# Altium PCB GMU.PcbDoc (part 1 of 2)
Units mil, origin at the board's own origin, x right, y up, seen from the top; angles counter-clockwise.
Board outline 2287.2 x 1425 mil, 4 copper layers (Top Layer, GND, 3V3, Bottom Layer), stack 38.189 mil thick; 106 components, 59 nets, 301 pads, 340 vias.
Unrouted connection lines stored in the file: 21.
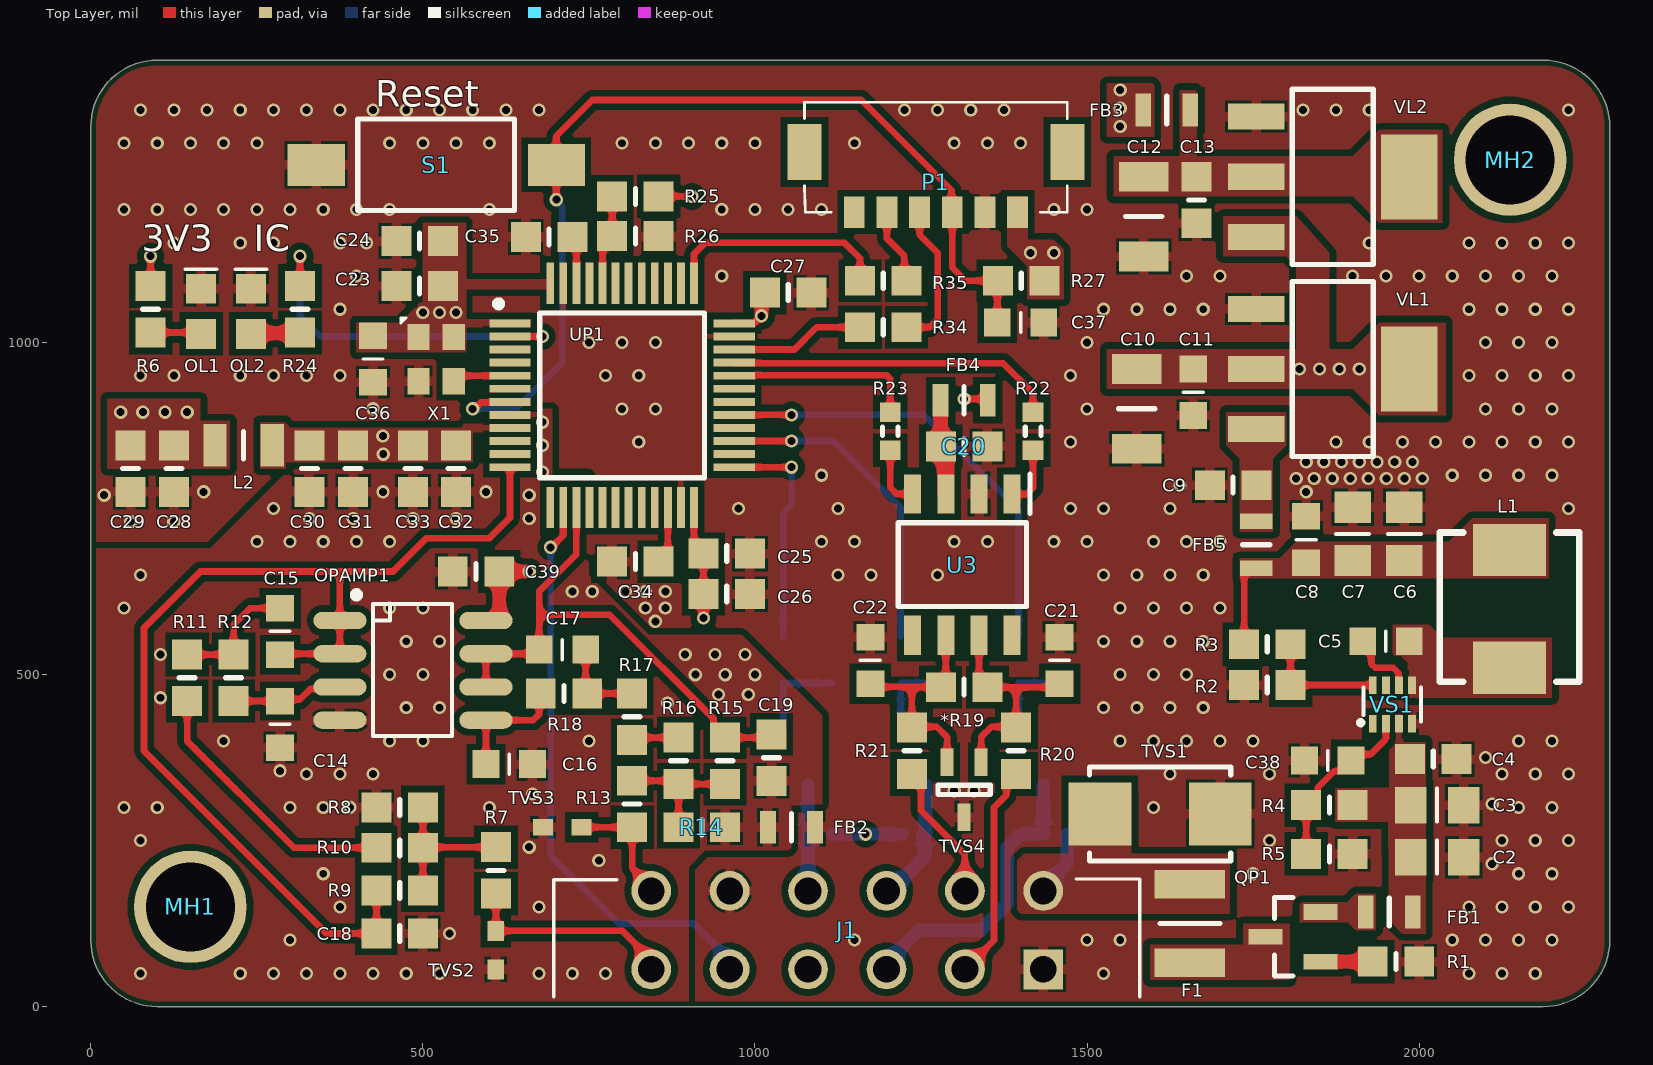
[diagram p0: Top Layer view]
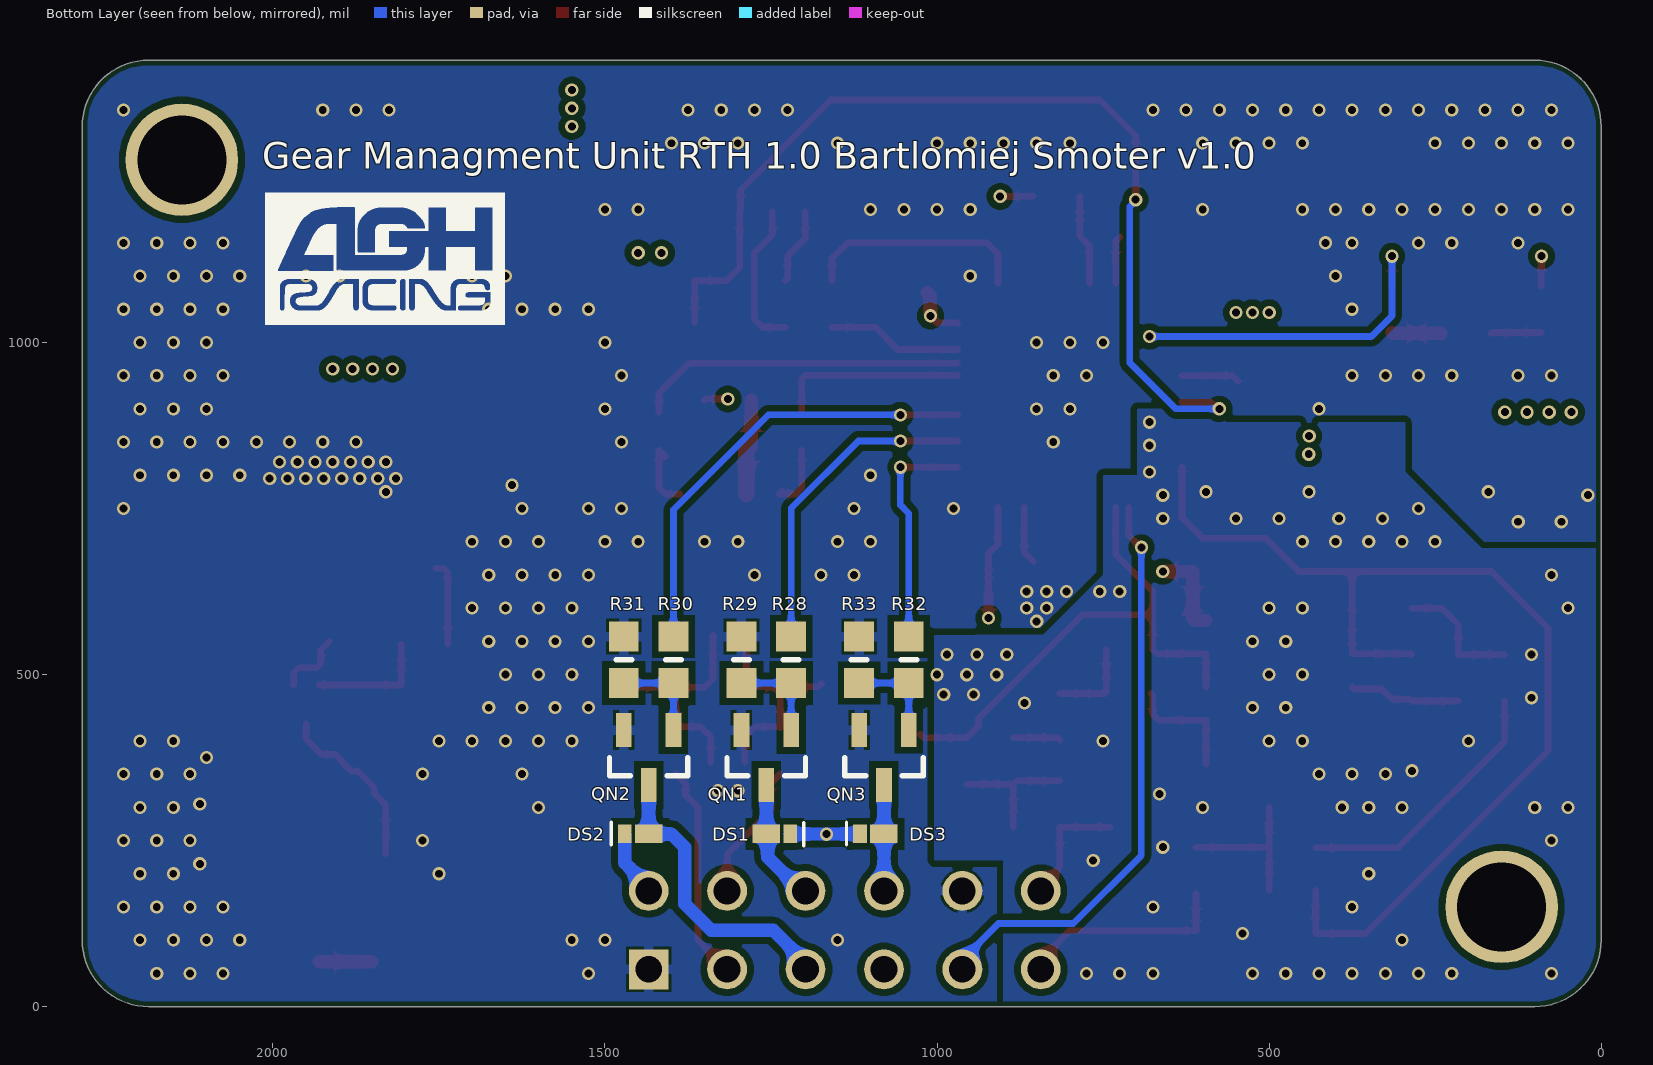
[diagram p1: Bottom Layer view, seen from below]
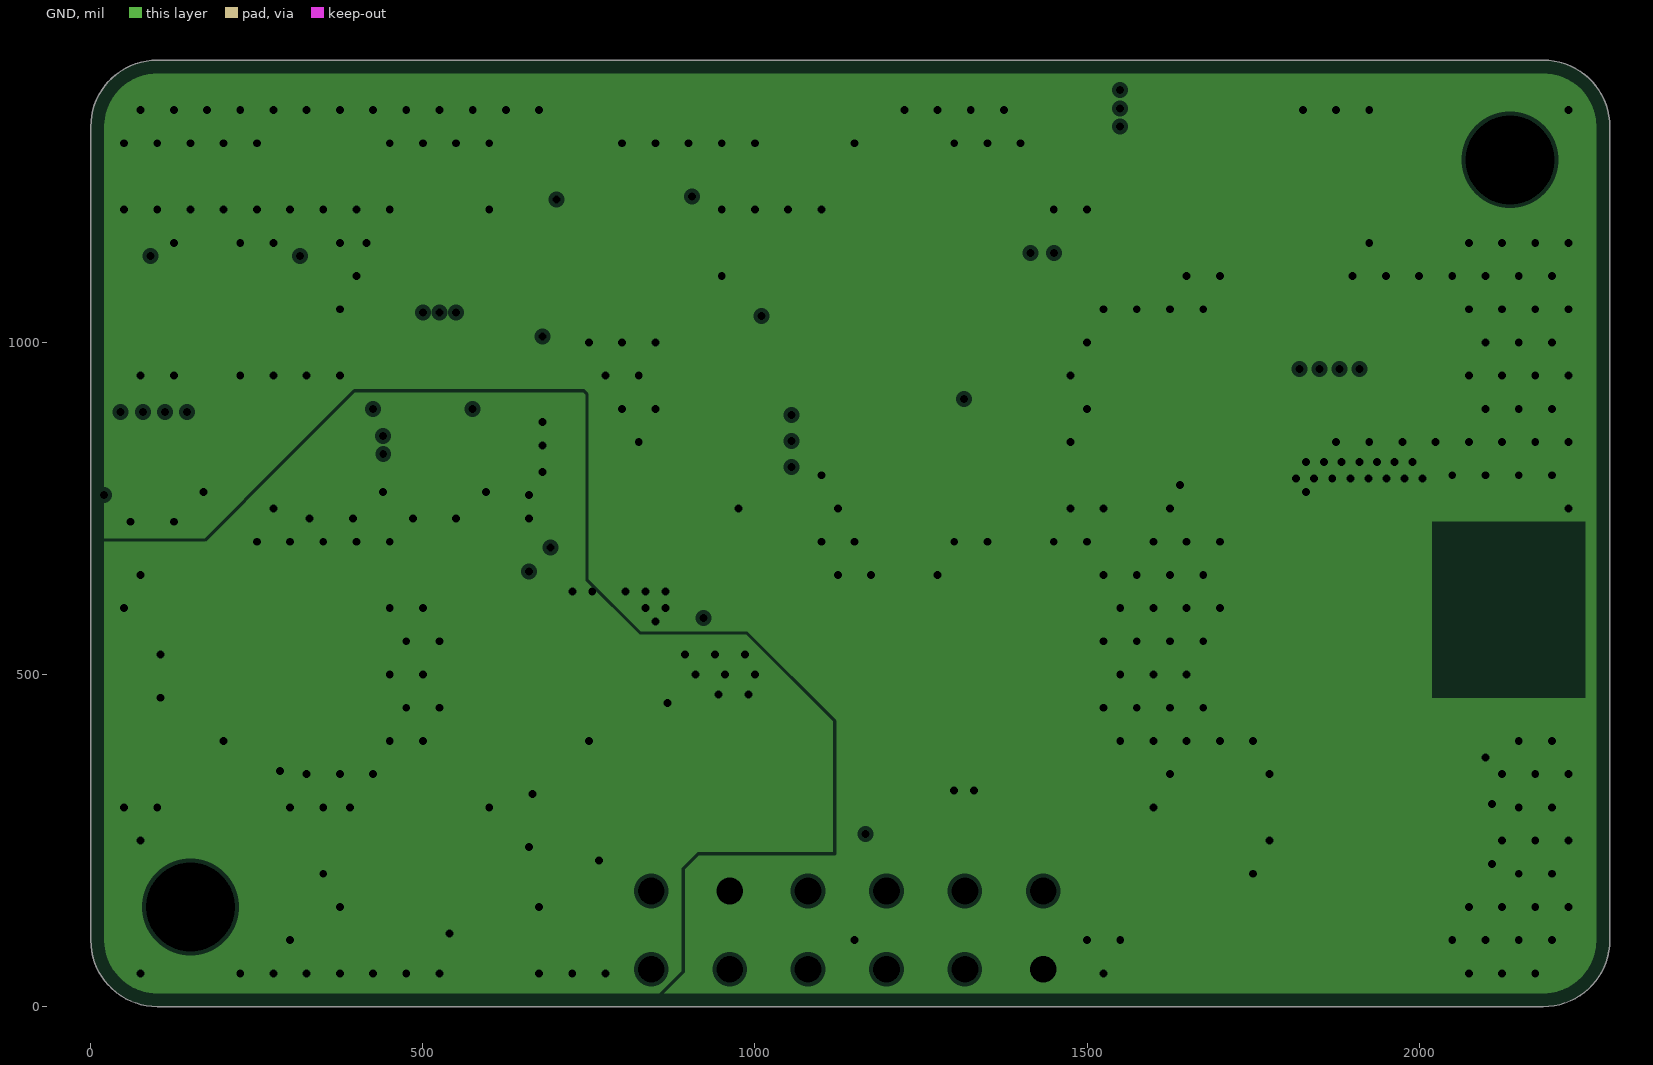
[diagram p2: GND, clearances drawn from the general rule]
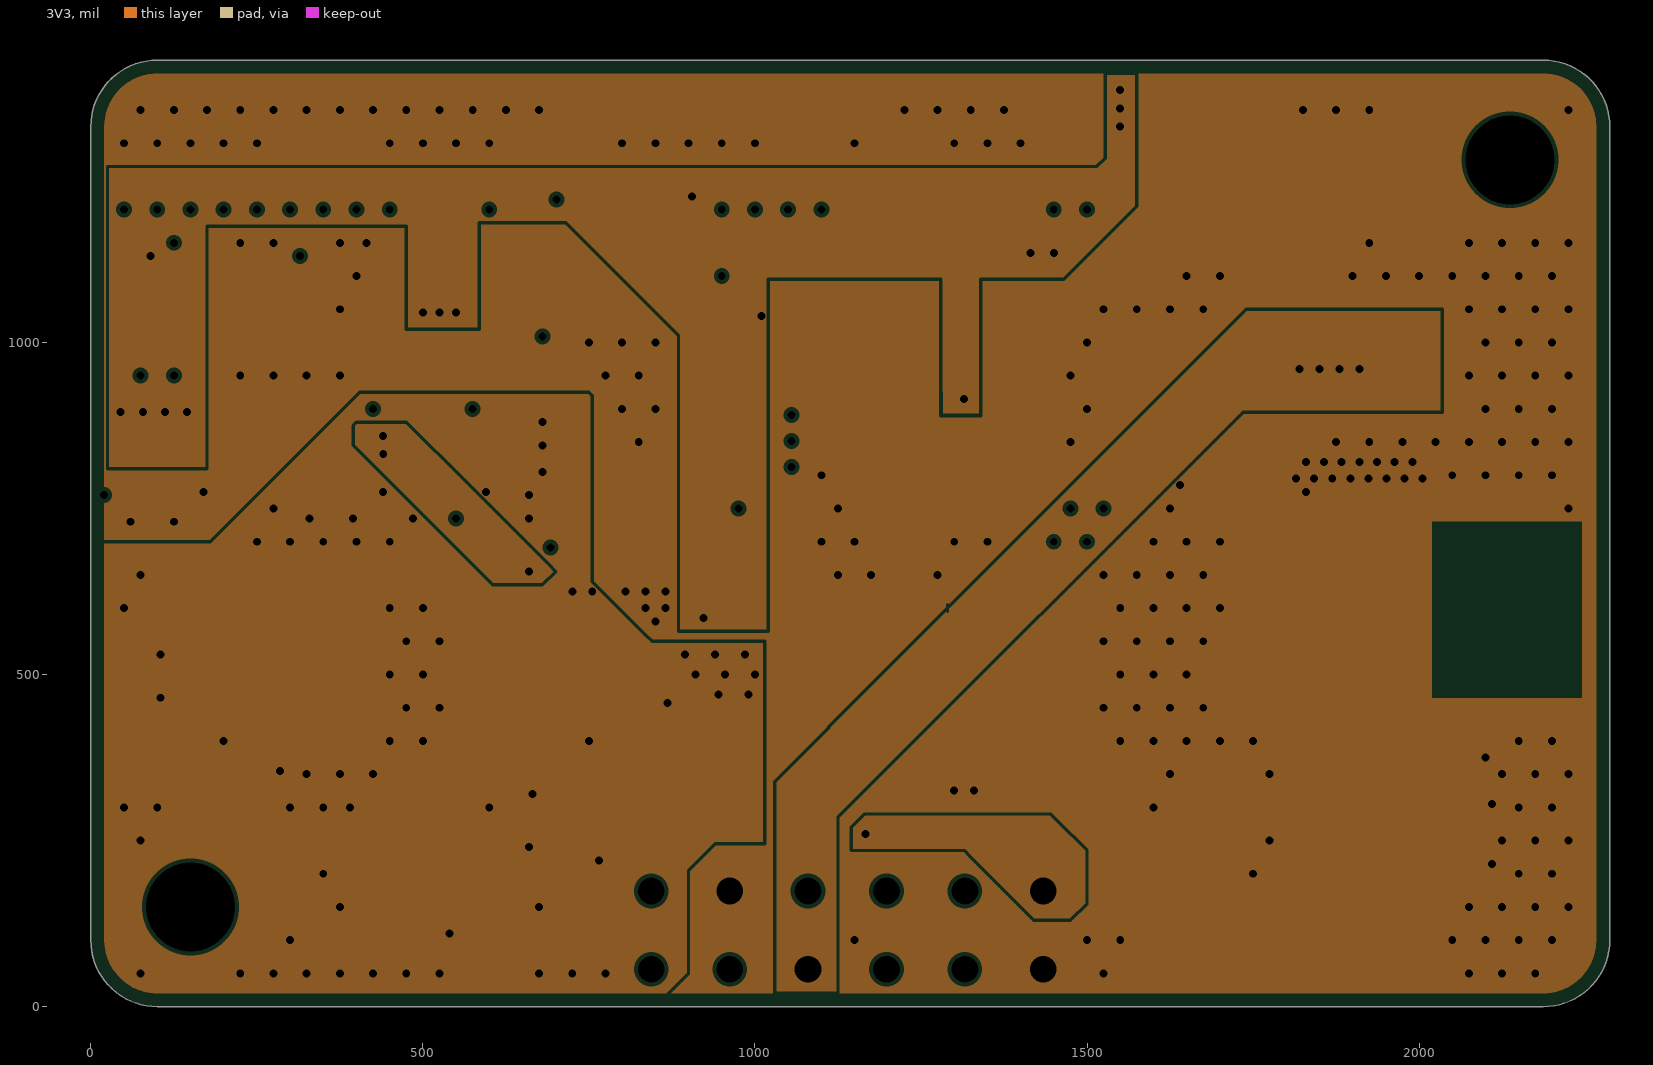
[diagram p3: 3V3, clearances drawn from the general rule]
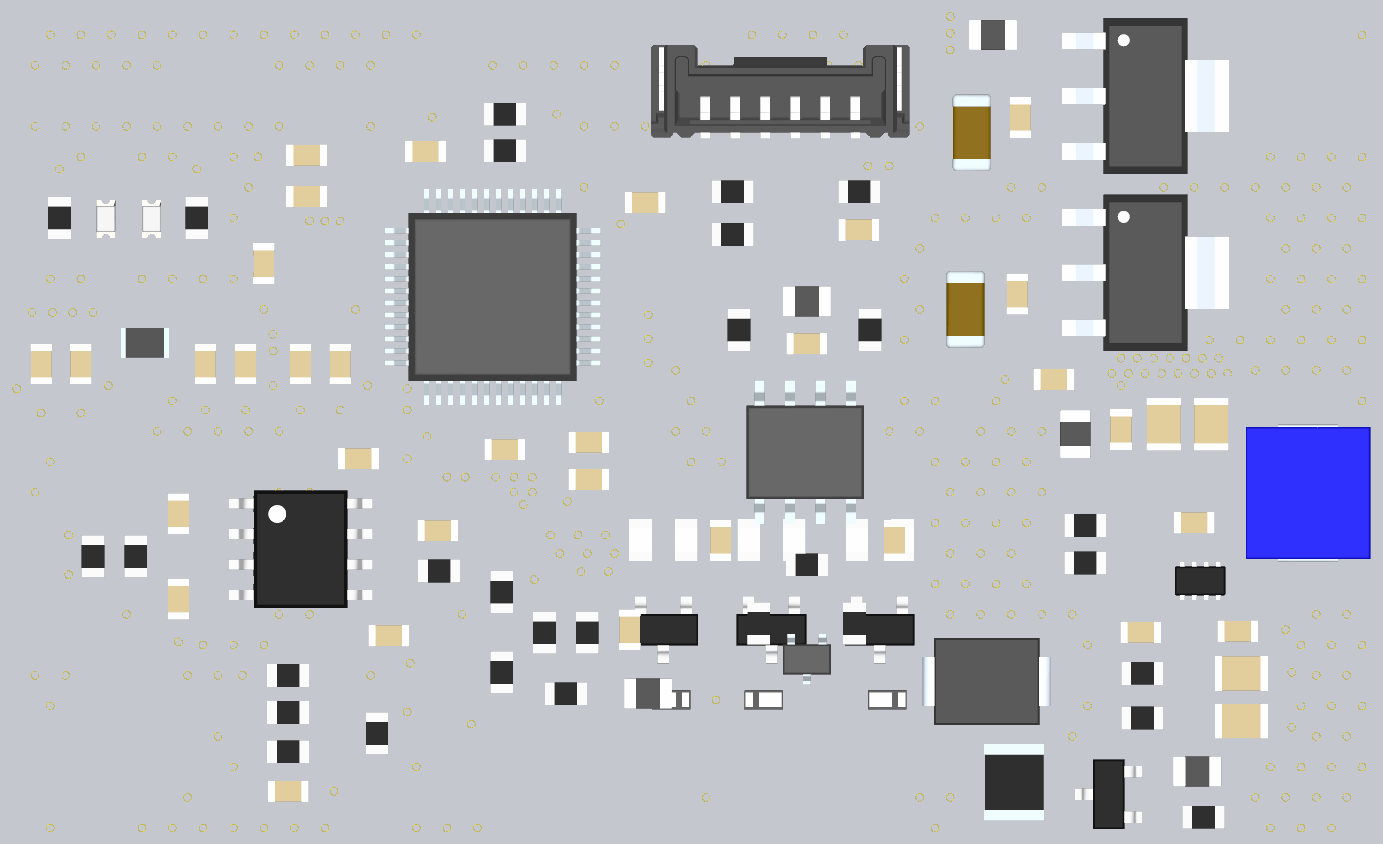
[diagram p4: 3D render of the assembled board from above, using the file's embedded part models]
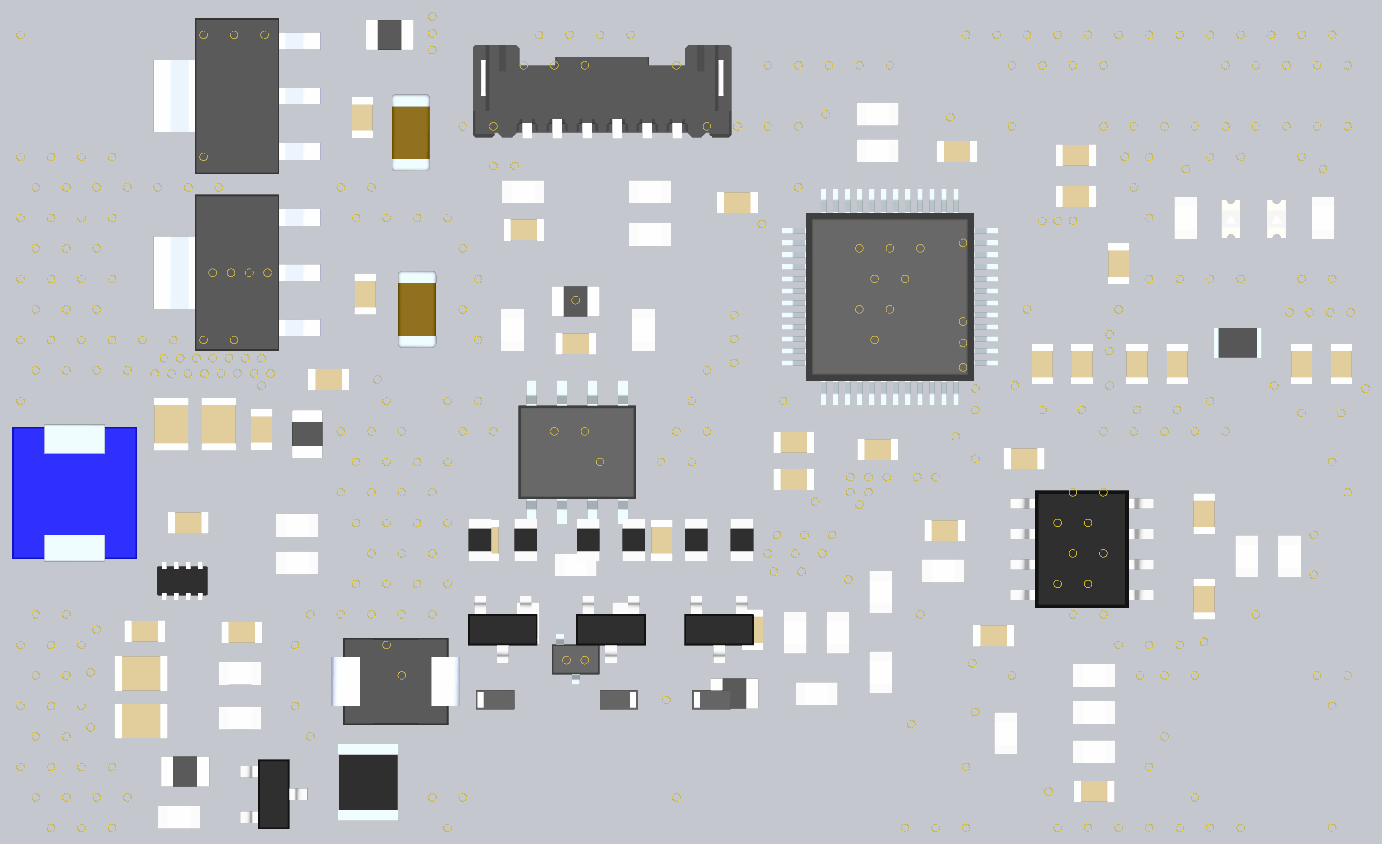
[diagram p5: 3D render of the assembled board from below, using the file's embedded part models]

## Layer stack, top to bottom
Top Solder: solder mask 0.5, Solder Resist, Dk 3.8
Top Layer: signal copper 1.378
Dielectric 2: prepreg 3.937, PP-006, Dk 4.05
GND: plane copper 0.689, net (Multiple Nets)
Dielectric 1: core 26.181, Core-038, Dk 4.5
3V3: plane copper 0.689, net (Multiple Nets)
Dielectric 3: prepreg 3.937, PP-006, Dk 4.05
Bottom Layer: signal copper 1.378
Bottom Solder: solder mask 0.5, Solder Resist, Dk 3.8

## Board outline
0,100 0,1325 cw(c100,1325) 100,1425 2187.2,1425 cw(c2187.2,1325) 2287.2,1325 2287.2,100 cw(c2187.2,100) 2187.2,0 100,0 cw(c100,100)

## Design rules (kind name [scope] priority, off if disabled: settings)
BoardOutlineClearance [All] p1: gap=7.87 ignorepadtopadclearanceinfootprint=FALSE
Clearance Clearance_MCU [WithinRoom('MCU')] p1: gap=0 ignorepadtopadclearanceinfootprint=TRUE
Clearance [All] p2: gap=5 ignorepadtopadclearanceinfootprint=FALSE
ComponentClearance [All] p1: gap=4 collisioncheckmode=3 verticalgap=4 showdistances=TRUE
Creepage [All] p1: checkdistance=10 applytopolygonpour=TRUE
DiffPairsRouting [All] p1: maxlimit=4 minlimit=4 mostfreqgap=4 toplayer_minwidth=4 toplayer_maxwidth=71497.94 toplayer_prefwidth=4 bottomlayer_minwidth=4 bottomlayer_maxwidth=71497.94 bottomlayer_prefwidth=4 maxuncoupledlength=500
Height [All] p1: minheight=0 maxheight=71497.94 prefheight=500
HoleSize [All] p1: absolutevalues=TRUE maxlimit=248.03 minlimit=7.87 maxpercent=80.000 minpercent=20.000
HoleToHoleClearance [All] p1: gap=10 allowstackedmicrovias=FALSE
MinimumAnnularRing [All] p1: minimumring=3
MinimumSolderMaskSliver [All] p1: minsoldermaskwidth=0
PlaneClearance [All] p1: clearance=6
PlaneConnect [All] p1: pad.planeconnectstyle=Relief pad.reliefexpansion=11.81 pad.reliefentries=4 pad.reliefconductorwidth=15 pad.reliefairgap=4 via.planeconnectstyle=Direct via.reliefexpansion=11.81 via.reliefentries=4 via.reliefconductorwidth=5 via.reliefairgap=5
PolygonConnect PolygonConnect_Power [InNet('12V_SAFE','SW','7V','5V','3V3','VDD','A3V3','NETC12_1','12V_In','NetF1_1','NetF1_2','NETFB1_1','NETC6_1')] p1: connectstyle=Direct reliefconductorwidth=10 reliefentries=4 polygonreliefangle="90 Angle" airgapwidth=10
PolygonConnect [All] p2: thpad.connectstyle=Relief thpad.reliefconductorwidth=15 thpad.reliefentries=4 thpad.polygonreliefangle="90 Angle" thpad.airgapwidth=4 smdpad.connectstyle=Relief smdpad.reliefconductorwidth=15 smdpad.reliefentries=4 smdpad.polygonreliefangle="90 Angle" smdpad.airgapwidth=4 via.connectstyle=Direct via.reliefconductorwidth=5 via.reliefentries=4 via.polygonreliefangle="90 Angle" via.airgapwidth=5
RoutingVias [All] p1: holewidth=7.87 width=17.72 viastyle="Through Hole" minholewidth=7.87 minwidth=17.72 maxholewidth=248.03 maxwidth=257.87
SilkToSilkClearance [All] p1: silktosilkclearance=1
SilkToSolderMaskClearance [IsPad] p1: minsilkscreentomaskgap=2 clearancetoexposedcopper=TRUE
SolderMaskExpansion SolderMaskExpansion_VIA [IsVia] p1: expansion=-20 istentingtop=FALSE
SolderMaskExpansion [All] p2: expansion=2.95 istentingtop=FALSE
UnRoutedNet [All] p1: checkbadconnections=TRUE
Width [All] p1: maxlimit=200 minlimit=5 preferedwidth=10
19 further rules are at their usual default settings.

## Classes and differential pairs
component class Main: J1 MH1 MH2
component class Actuators: DS1 DS2 DS3 QN1 QN2 QN3 R28 R29 R30 R31 R32 R33
component class "Power Supply": C2 C3 C4 C5 C6 C7 C8 C9 C10 C11 C12 C13 C28 C29 C30 C31 C38 F1 FB1 FB3 FB5 L1 L2 OL1 QP1 R1 R2 R3 R4 R5 R6 TVS1 U1 VL1 VL2 VS1
component class MCU: C23 C24 C25 C26 C27 C32 C33 C34 C35 C36 C37 FB2 OL2 P1 R24 R25 R26 R27 R34 R35 S1 UP1 X1
component class "Analog Section": C14 C15 C16 C17 C18 C19 C39 OPAMP1 R7 R8 R9 R10 R11 R12 R13 R14 R15 R16 R17 R18 TVS2 TVS3
component class "CAN Transiver": *R19 C20 C21 C22 FB4 R20 R21 R22 R23 TVS4 U3
differential pair CAN: +CAN_TX -CAN_RX
differential pair CAN: +CAN_H -CAN_L

## Components (designator, comment, footprint, x,y, rotation, side; value= is the part's Value field where it differs from the comment)
*R19 "R_120_0603_5" 0603_HandSold_Resistor 1314.96,480.89 r0 top
C2 "C_10u_50V_0805_10" 0805_Capacitor 2027.37,225 r0 top value=10µF
C3 "C_10u_50V_0805_10" 0805_Capacitor 2027.37,303.37 r0 top value=10µF
C4 "C_220n_50V_0603_5" 0603_HandSold_Capacitor#1 2021.25,372.55 r0 top value=220nF
C5 "C_100n_50V_0603_5" 0603_HandSold_Capacitor#2 1950,550 r0 top value=100nF
C6 "C_10u_50V_0805_10" 0805_Capacitor 1977.91,711.73 r90 top value=10µF
C7 "C_10u_50V_0805_10" 0805_Capacitor 1900,711.73 r90 top value=10µF
C8 "C_100n_50V_0603_5" 0603_HandSold_Capacitor#2 1830,703.11 r90 top value=100nF
C9 "C_1u_16V_0603_5" 0603_HandSold_Capacitor#1 1720,785.05 r180 top value=1µF
C10 "C_100u_16V_1206_5" 1206_HandSold_Capacitor 1575,900 r270 top value=100µF
C11 "C_100n_50V_0603_5" 0603_HandSold_Capacitor#2 1660,925 r270 top value=100nF
C12 "C_100u_16V_1206_5" 1206_HandSold_Capacitor 1585.47,1189.44 r270 top value=100µF
C13 "C_220n_50V_0603_5" 0603_HandSold_Capacitor#1 1665,1214.44 r270 top value=220nF
C14 "C_1n_50V_0603_5" 0603_HandSold_Capacitor#2 285,425 r270 top value=1nF
C15 "C_1n_50V_0603_5" 0603_HandSold_Capacitor#2 285,565 r270 top value=1nF
C16 "C_1n_50V_0603_5" 0603_HandSold_Capacitor#2 630,365 r0 top value=1nF
C17 "C_1n_50V_0603_5" 0603_HandSold_Capacitor#2 710,537.39 r180 top value=1nF
C18 "C_10n_50V_0603_5" 0603_HandSold_Capacitor#1 465,110 r0 top value=10nF
C19 "C_10n_50V_0603_5" 0603_HandSold_Capacitor#1 1025,374.81 r270 top value=10nF
C20 "C_1u_16V_0603_5" 0603_HandSold_Capacitor#1 1314.96,843.37 r0 top value=1µF
C21 "C_220p_50V_0603_5" 0603_HandSold_Capacitor#2 1458.74,521.34 r90 top value=220pF
C22 "C_220p_50V_0603_5" 0603_HandSold_Capacitor#2 1173.74,521.34 r90 top value=220pF
C23 "C_100n_50V_0603_5" 0603_HandSold_Capacitor#1 495,1085 r180 top value=100nF
C24 "C_100n_50V_0603_5" 0603_HandSold_Capacitor#1 495,1152.72 r180 top value=100nF
C25 "C_100n_50V_0603_5" 0603_HandSold_Capacitor#1 957.51,681.99 r0 top value=100nF
C26 "C_4.7u_25V_0603_5" 0603_HandSold_Capacitor#1 957.51,621.06 r0 top value=4.7µF
C27 "C_100n_50V_0603_5" 0603_HandSold_Capacitor#1 1050,1075 r0 top value=100nF
C28 "C_100n_50V_0603_5" 0603_HandSold_Capacitor#1 125,810 r270 top value=100nF
C29 "C_10u_25V_0603_10" 0603_HandSold_Capacitor#1 60,810 r270 top value=10µF
C30 "C_10u_25V_0603_10" 0603_HandSold_Capacitor#1 329.22,810 r270 top value=10µF
C31 "C_100n_50V_0603_5" 0603_HandSold_Capacitor#1 395,810 r270 top value=100nF
C32 "C_100n_50V_0603_5" 0603_HandSold_Capacitor#1 550,810 r270 top value=100nF
C33 "C_1u_16V_0603_5" 0603_HandSold_Capacitor#1 485,810 r270 top value=1µF
C34 "C_2.2u_25V_0603_5" 0603_HandSold_Capacitor#1 820,670 r180 top value=2.2µF
C35 "C_2.2u_25V_0603_5" 0603_HandSold_Capacitor#1 690,1158.82 r180 top value=2.2µF
C36 "C_100n_50V_0603_5" 0603_HandSold_Capacitor#2 425,975 r270 top value=100nF
C37 "C_100n_50V_0603_5" 0603_HandSold_Capacitor#2 1400,1030 r0 top value=100nF
C38 "C_10n_50V_0603_5" 0603_HandSold_Capacitor#2 1862.5,370.5 r180 top value=10nF
C39 "C_100n_50V_0603_5" 0603_HandSold_Capacitor#1 580,655 r180 top value=100nF
DS1 "DS_NSR20F30NXT5G" 0603 1239.1,260 r0 bottom
DS2 "DS_NSR20F30NXT5G" 0603 1452.29,260 r180 bottom
DS3 "DS_NSR20F30NXT5G" 0603 1097.96,260 r180 bottom
F1 "F_1210_2.5A" 1210 1655,125 r270 top
FB1 "FB_BLM21PG121SN1D" 0805_FB 1955,142.4 r0 top
FB2 "FB_BLM21PG121SN1D" 0805_FB 1055,270 r180 top
FB3 "FB_BLM21PG121SN1D" 0805_FB 1620,1350 r180 top
FB4 "FB_BLM21PG121SN1D" 0805_FB 1314.96,913.04 r180 top
FB5 "FB_BLM21PG121SN1D" 0805_FB 1755,695.35 r90 top
J1 "J_43045-1200" 43045-1200 1139,30 r0 top
L1 "L_SRP5030CC-100M" L_2220 2136.37,598.9 r90 top value=10µH
L2 "L_TMS201610ALM-1R0MTAA" 0805_HandSold_Inductor 230,845 r0 top value=1µH
MH1 "MH_M3" M3 150,150 r0 top
MH2 "MH_M3" M3 2137,1275 r0 top
OL1 "OL_150060VS75000" 0603_HandSold_LED 166.05,1046.93 r270 top
OL2 "OL_150060BS75000" 0603_HandSold_LED 241.05,1046.93 r270 top
OPAMP1 "OPAMP_AD8606ARZ" SOIC-8 485,506.27 r270 top
P1 "J_505568-0671" 505568-0671 1272.53,1267.18 r0 top
QN1 "QN_IRLML6344TRPBF" SOT23 1257.11,375 r270 bottom
QN2 "QN_IRLML6344TRPBF" SOT23 1434.28,375 r270 bottom
QN3 "QN_IRLML6344TRPBF" SOT23 1079.94,375 r270 bottom
QP1 "QP_ZXMP3A13FTA" SOT23 1810,105 r180 top
R1 "R_1k_0603_5" 0603_HandSold_Resistor 1965.26,67.6 r180 top
R2 "R_10k_0603_5" 0603_HandSold_Resistor 1771.54,484.13 r0 top
R3 "R_75k_0603_1" 0603_HandSold_Resistor 1771.54,545.54 r180 top
R4 "R_27k_0603_1" 0603_HandSold_Resistor 1865,303.37 r0 top
R5 "R_10k_0603_5" 0603_HandSold_Resistor 1865,230 r180 top
R6 "R_220_0603_5" 0603_HandSold_Resistor 90,1050 r90 top
R7 "R_6.8k_0603_5" 0603_HandSold_Resistor 610,205 r90 top
R8 "R_10k_0603_5" 0603_HandSold_Resistor 465,300 r180 top
R9 "R_0_0603_5" 0603_HandSold_Resistor 465,175 r180 top
R10 "R_0_0603_5" 0603_HandSold_Resistor 465,239.07 r180 top
R11 "R_39k_0603_5" 0603_HandSold_Resistor 145,495 r90 top
R12 "R_39k_0603_5" 0603_HandSold_Resistor 215,495 r270 top
R13 "R_6.8k_0603_5" 0603_HandSold_Resistor 815,305 r90 top
R14 "R_10k_0603_5" 0603_HandSold_Resistor 920,270 r0 top
R15 "R_0_0603_5" 0603_HandSold_Resistor 955,370 r90 top
R16 "R_0_0603_5" 0603_HandSold_Resistor 885,370 r90 top
R17 "R_39k_0603_5" 0603_HandSold_Resistor 815,436.35 r90 top
R18 "R_39k_0603_5" 0603_HandSold_Resistor 712.5,471.35 r180 top
R20 "R_27_0603_5" 0603_HandSold_Resistor 1393.22,385.15 r270 top
R21 "R_27_0603_5" 0603_HandSold_Resistor 1236.27,385.15 r270 top
R22 "Resistor" R_0603_1608 1418.74,866.34 r270 top value=27R
R23 "Resistor" R_0603_1608 1203.74,866.29 r270 top value=27R
R24 "R_1k_0603_5" 0603_HandSold_Resistor 315,1050 r90 top
R25 "R_1k_0603_1" 0603_HandSold_Resistor 820,1220 r180 top
R26 "R_1k_0603_1" 0603_HandSold_Resistor 820,1160 r0 top
R27 "R_10k_0603_5" 0603_HandSold_Resistor 1401.03,1092.9 r0 top
R28 "R_1k_0603_5" 0603_HandSold_Resistor 1219.71,522.11 r270 bottom
R29 "R_100k_0603_5" 0603_HandSold_Resistor 1294.51,522.11 r90 bottom
R30 "R_1k_0603_5" 0603_HandSold_Resistor 1396.87,522.11 r270 bottom
R31 "R_100k_0603_5" 0603_HandSold_Resistor 1471.68,522.11 r90 bottom
R32 "R_1k_0603_5" 0603_HandSold_Resistor 1042.54,522.11 r270 bottom
R33 "R_100k_0603_5" 0603_HandSold_Resistor 1117.35,522.11 r90 bottom
R34 "R_27_0603_5" 0603_HandSold_Resistor 1193.29,1022.9 r180 top
R35 "R_27_0603_5" 0603_HandSold_Resistor 1193.29,1092.9 r180 top
S1 "SW_FSMSMTR" TECO-FSMSMTR_V 520,1267.38 r0 top
TVS1 "TVS_SMBJ15CA-13-F" "DO-214AA (SMB J-Bend) footprint" 1610,290 r180 top
TVS2 "TVS_LAD52C05L01" SOD-523-2_ALT 610,85 r270 top
TVS3 "TVS_LAD52C05L01" SOD-523-2_ALT 710,270 r180 top
TVS4 "TVS_ESDCAN02-2BWY" SOT-323-3 1315,326.34 r270 top
U3 "U_SN65HVD232DR" SOIC8 1312.4,665.57 r270 top
UP1 "UP_STM32H33CET6" LQFP48 800,920.41 r0 top
VL1 "VL_ADP3338AKCZ-5-R7" SOT223-3 1870,960 r0 top
VL2 "VL_ADP3338AKCZ-3.3-RL" SOT223-3 1870,1249.44 r0 top
VS1 "VS_TPS563300" SOT-5X3-8 1959.81,455 r90 top
X1 "X_16MHz_LFSPXO066657CUTT" X_2mm_2.5mm_oscillator 520,975 r90 top

## Footprints (in the part's own frame and the unit in brackets; to place one, negate y for a bottom-side part, rotate by r counter-clockwise, add the part's x,y. Pads: shape width x height; smd on the part's side, far side on the other; paste and mask are expansions set on the pad)
0603 [mm]
  rect 0.52x0.7 smd: 1(-0.457,0)
  rect 1.05x0.7 smd: 2(0.458,0)
  silkscreen extent -0.97,-0.43 -0.97,0.45, body extent -0.67,-0.4 0.93,0.4, height 0.29
0603_HandSold_Capacitor#1 [mil] "Default; Revision #1.1 / Footprint dedicated for design that will be soldered manually."
  rect 45x45 smd: 1(-35,0) 2(35,0)
  silkscreen extent 0,-12 0,12, body extent -33,-18 33,18, height 35
0603_HandSold_Capacitor#2 [mil] "Default; Revision #1 / Footprint dedicated for design that will be soldered manually."
  rect 40x42 smd: 1(-35,0) 2(35,0)
  silkscreen extent 0,-15 0,15, body extent -33,-18 33,18, height 35
0603_HandSold_LED [mil]
  rect 45x45 smd: 1(-34,0) 2(34,0)
  silkscreen extent -63,-24 -63,24, body extent -33,-16 30,16, height 28
0603_HandSold_Resistor [mil] "Footprint dedicated for projects soldered by hand"
  rect 45x45 smd: 1(-35,0) 2(35,0)
  silkscreen extent 0,-12 0,12, body extent -34,-19 34,19, height 21
0805_Capacitor [mil] "Default; Revision #1"
  rect 47.24x55 smd: 1(-40,0) 2(40,0)
  silkscreen extent 0,-25 0,25, body extent -43,-29 43,29, height 53
0805_FB [mm]
  rect 0.6x1.25 smd: 1(-0.9,0) 2(0.9,0)
  silkscreen extent 0,-0.53 0,0.53, body extent -1,-0.63 1,0.63, height 0.88
0805_HandSold_Inductor [mil] "Default; Revision #0"
  rect 35x64 smd: 1(-43,0) 2(43,0)
  silkscreen extent 0,-21 0,21, body extent -39,-25 39,25, height 47
1206_HandSold_Capacitor [mil] "Default; Revision #1 / Footprint dedicated for design that will be soldered manually."
  rect 45x75 smd: 1(-60,0) 2(60,0)
  silkscreen extent 0,-28 0,28, body extent -63,-31 63,31, height 71
1210 [mm] "Default; Revision #1"
  rect 1.1x2.7 smd: 1(-1.5,0) 2(1.5,0)
  silkscreen extent 0,-1.15 0,1.15, body extent -1.6,-1.25 1.6,1.25, height 0.7
43045-1200 [mm] "Micro-Fit 3.0"
  rect 1.52x1.52 hole 1.02: 1(7.5,0.66)
  round 1.52 hole 1.02: 2(4.5,0.66) 3(1.5,0.66) 4(-1.5,0.66) 5(-4.5,0.66) 6(-7.5,0.66) 7(7.5,3.66) 8(4.5,3.66) 9(1.5,3.66) 10(-1.5,3.66) 11(-4.5,3.66) 12(-7.5,3.66)
  silkscreen extent -11.22,-0.38 11.18,4.12, body extent -11.09,-8.25 11.05,3.99, height 8.83
505568-0671 [mm] "Micro-Lock Plus"
  rect 0.8x1.2 smd: 1(3.125,-1.8) 2(1.875,-1.8) 3(0.625,-1.8) 4(-0.625,-1.8) 5(-1.875,-1.8) 6(-3.125,-1.8)
  rect 1.3x2.15 smd: 7(5.025,0.495) 8(-5.025,0.495)
  silkscreen extent -5.02,-1.8 5.02,2.4, body extent -5.4,-2.22 5.35,1.68, height 4.2
"DO-214AA (SMB J-Bend) footprint" [mm]
  rect 2.4x2.4 smd: 1(-2.3,0) 2(2.3,0)
  silkscreen extent -2.7,-1.8 2.7,1.8, body extent -2.67,-1.81 2.67,1.81, height 2.65
L_2220 [mm]
  rect 2x2.8 smd: 1(-2.25,0) 2(2.25,0)
  silkscreen extent -2.79,-2.67 2.92,2.67, body extent -2.85,-2.6 2.85,2.6, height 3
LQFP48 [mm] "Default; Revision #1"
  rect 1.575x0.3 smd: 1(-4.288,2.75) 2(-4.288,2.25) 3(-4.288,1.75) 4(-4.288,1.25) 5(-4.288,0.75) 6(-4.288,0.25) 7(-4.288,-0.25) 8(-4.288,-0.75) 9(-4.288,-1.25) 10(-4.288,-1.75) 11(-4.288,-2.25) 12(-4.288,-2.75) 25(4.288,-2.75) 26(4.288,-2.25) 27(4.288,-1.75) 28(4.288,-1.25) 29(4.288,-0.75) 30(4.288,-0.25) 31(4.288,0.25) 32(4.288,0.75) 33(4.288,1.25) 34(4.288,1.75) 35(4.288,2.25) 36(4.288,2.75)
  rect 0.3x1.575 smd: 13(-2.75,-4.288) 14(-2.25,-4.288) 15(-1.75,-4.288) 16(-1.25,-4.288) 17(-0.75,-4.288) 18(-0.25,-4.288) 19(0.25,-4.288) 20(0.75,-4.288) 21(1.25,-4.288) 22(1.75,-4.288) 23(2.25,-4.288) 24(2.75,-4.288) 37(2.75,4.288) 38(2.25,4.288) 39(1.75,4.288) 40(1.25,4.288) 41(0.75,4.288) 42(0.25,4.288) 43(-0.25,4.288) 44(-0.75,4.288) 45(-1.25,4.288) 46(-1.75,4.288) 47(-2.25,4.288) 48(-2.75,4.288)
  silkscreen extent -4.85,-3.15 3.15,3.62, body extent -4.5,-4.5 4.5,4.5, height 1.6
M3 [mm] "Default; Revision #1"
  round 4.3 hole 3.4: 1(0,0)
R_0603_1608 [mm]
  rect 0.75x0.8 smd: 1(-0.725,0) 2(0.725,0)
  silkscreen extent -0.15,-0.3 0.15,0.3, body extent -0.87,-0.47 0.88,0.48, height 0.54
SOD-523-2_ALT [mil] "Alternative footprint for SOD-523 wihout the distinction between pins / Default; Revision #1"
  rect 30x25 smd: 1(29,0) 2(-29,0)
  body extent -31,-16 31,16, height 26
SOIC8 [mm] "Default; Revision #1"
  rect 1.5x0.65 smd: 1(-2.7,1.905) 2(-2.7,0.635) 3(-2.7,-0.635) 4(-2.7,-1.905) 5(2.7,-1.905) 6(2.7,-0.635) 7(2.7,0.635) 8(2.7,1.905)
  silkscreen extent -3.45,-2.45 1.6,2.58, body extent -3,-2.45 3,2.45, height 1.75
SOIC-8 [mil]
  oval 26x80 smd: 1(-75,-110) 2(-25,-110) 3(25,-110) 4(75,-110) 5(75,110) 6(25,110) 7(-25,110) 8(-75,110)
  silkscreen extent -119,-90 99,59, body extent -97,-118 96,118, height 69
SOT23 [mm] "ORIGINAL"
  rect 1.3x0.6 smd: 1(-1.05,0.95) 2(-1.05,-0.95) 3(1.05,0)
  silkscreen extent 0,-1.5 0.7,1.5, body extent -1.4,-1.45 1.4,1.45, height 1.3
SOT223-3 [mm] "Default; Revision #1"
  rect 2.15x1 smd: 1(-2.925,2.3) 2(-2.925,0) 3(-2.925,-2.3)
  rect 2.15x3.25 smd: 4(2.925,0)
  silkscreen extent -1.55,-3.35 1.55,3.35, body extent -3.5,-3.25 3.5,3.25, height 1.8
SOT-5X3-8 [mm]
  rect 0.67x0.3 smd: 1(-0.74,0.75) 2(-0.74,0.25) 3(-0.74,-0.25) 4(-0.74,-0.75) 5(0.74,-0.75) 6(0.74,-0.25) 7(0.74,0.25) 8(0.74,0.75)
  silkscreen extent -0.78,-1.1 0.65,1.29, body extent -0.8,-1.05 0.8,1.05, height 0.6
SOT-323-3 [mm]
  rect 1.05x0.5 smd: 1(-1.05,0.65) 2(-1.05,-0.65) 3(1.05,0)
  silkscreen extent -0.18,-1 0.18,1, body extent -1.05,-1 1.05,1, height 1.1
TECO-FSMSMTR_V [mm] "SMD, 2-Leads, Body 6x3.5mm, Pitch 9.19mm"
  rect 2.2x1.6 smd: 1(-4.595,0)
  rect 2.18x1.6 smd: 2(4.595,0)
  silkscreen extent -3,-1.75 3,1.75, body extent -4.98,-1.75 4.98,1.75, height 4.44
X_2mm_2.5mm_oscillator [mm]
  rect 1x0.85 smd: 1(0.85,0.675) 2(-0.85,0.675) 3(-0.85,-0.675) 4(0.85,-0.675)
  silkscreen extent 1.38,1.15 1.58,1.35, body extent -1.25,-1 1.25,1, height 0.83

## Part data
*R19: library part CMP-009-00040-15, Case/Package=0603, Power=100mW, Resistance=120, Tolerance=5%, Voltage Rating=50V, HelpURL=https://www.tme.eu/Document/d2a72e545e5c8eb7bf2a04fa97535928/rc0603yageo.pdf, Mounting Technology=SMT, Revision Num.=1, SCH_Footprint=0603
C2 C3 C6 C7: library part CMP-001-00003-15, Capacitor Type=Ceramic, Case/Package=0805, Tolerance=5%, Voltage Rating=50V, HelpURL=https://www.tme.eu/Document/58bb7db4269ac3ad53d1aa3c0ade9bab/GRM.pdf, Mounting Technology=SMT, Revision Num.=1
C4 C13: library part CMP-001-00023-24, Capacitor Type=Ceramic, Case/Package=0603, Tolerance=5%, Voltage Rating=50V, HelpURL=https://www.mouser.pl/datasheet/2/40/KGM_X7R-3223212.pdf, Mounting Technology=SMT, Revision Num.=1
C5 C8 C11: library part CMP-001-00008-25, Capacitor Type=Ceramic, Case/Package=0603, Tolerance=5%, Voltage Rating=50V, HelpURL=https://www.tme.eu/Document/78f46414e6dac38b7cca12338ea208b0/X7RDielectric.pdf, Mounting Technology=SMT, Revision Num.=1
C9 C20 C33: library part CMP-001-00014-23, Capacitor Type=Ceramic, Case/Package=0603, Tolerance=5%, Voltage Rating=16V, HelpURL=https://eu.mouser.com/datasheet/2/40/KGM_X7R-3223212.pdf, Mounting Technology=SMT, Revision Num.=1
C10 C12: library part CMP-001-00056-1, Capacitor Type=Ceramic, Case/Package=1206, Tolerance=5%, Voltage Rating=16V, HelpURL=https://www.tme.eu/Document/7e71bc7e80441897b2dc5cf4de77e476/c-series_en.pdf, Mounting Technology=SMT, Revision Num.=0
C14 C15 C16 C17: library part CMP-001-00012-23, Capacitor Type=Ceramic, Case/Package=0603, Tolerance=5%, Voltage Rating=50V, HelpURL=https://www.tme.eu/Document/c9f83032181d562eecbad103d884e6f2/C0603C102J5RACTU.pdf, Mounting Technology=SMT, Revision Num.=1
C18 C19: library part CMP-001-00009-26, Capacitor Type=Ceramic, Case/Package=0603, Tolerance=5%, Voltage Rating=50V, HelpURL=https://www.tme.eu/Document/78f46414e6dac38b7cca12338ea208b0/X7RDielectric.pdf, Mounting Technology=SMT, Revision Num.=1
C21 C22: library part CMP-001-00019-21, Capacitor Type=Ceramic, Case/Package=0603, Tolerance=5%, Voltage Rating=50V, HelpURL=https://www.tme.eu/Document/bbf9b851c2f67970461c4f5edb477604/C0GNP0-Dielectric.pdf, Mounting Technology=SMT, Revision=1, Revision Num.=1
C23 C24 C25 C27 C28 C31 C32 C39: library part CMP-001-00008-26, Capacitor Type=Ceramic, Case/Package=0603, Tolerance=5%, Voltage Rating=50V, HelpURL=https://www.tme.eu/Document/78f46414e6dac38b7cca12338ea208b0/X7RDielectric.pdf, Mounting Technology=SMT, Revision Num.=1
C26: library part CMP-001-00011-25, Capacitor Type=Ceramic, Case/Package=0603, Tolerance=5%, Voltage Rating=25V, HelpURL=https://eu.mouser.com/datasheet/2/40/cx5r_KGM-3223198.pdf, Mounting Technology=SMT, Revision Num.=1
C29 C30: library part CMP-001-00061-2, "C_10u_10V_0603_10", Capacitor Type=Ceramic, Case/Package=0603, Tolerance=10%, Voltage Rating=25V, HelpURL=https://www.tme.eu/Document/58bb7db4269ac3ad53d1aa3c0ade9bab/GRM.pdf, Mounting Technology=SMT, Revision Num.=1
C34 C35: library part CMP-001-00022-23, Capacitor Type=Ceramic, Case/Package=0603, Tolerance=5%, Voltage Rating=25V, HelpURL=https://eu.mouser.com/datasheet/2/281/1/GRT188C71E225KE13_01A-3158366.pdf, Mounting Technology=SMT, Revision Num.=1
C36 C37: library part CMP-001-00008-22, Capacitor Type=Ceramic, Case/Package=0603, Tolerance=5%, Voltage Rating=50V, HelpURL=https://www.tme.eu/Document/78f46414e6dac38b7cca12338ea208b0/X7RDielectric.pdf, Mounting Technology=SMT, Revision Num.=1
C38: library part CMP-001-00009-25, Capacitor Type=Ceramic, Case/Package=0603, Tolerance=5%, Voltage Rating=50V, HelpURL=https://www.tme.eu/Document/78f46414e6dac38b7cca12338ea208b0/X7RDielectric.pdf, Mounting Technology=SMT, Revision Num.=1
DS1 DS2 DS3: library part CMP-004-00030-1, "Schottky, 480mV 2A 1.75W 0603", Case/Package=0603, Man. Part Num.=NSR20F30NXT5G, Max. Forward Current=2A, Max. Forward Voltage=480mV, Power=1.75W, Reverse Voltage=30V, HelpURL=https://www.mouser.pl/datasheet/2/308/1/NSR20F30_D-2318285.pdf, Mounting Technology=SMT, Revision Num.=1, Type of Diode=Schottky
F1: library part CMP-005-00012-5, "Fuse; Resettable; MF-USHT; 0.5A, 2.5A, 20A; 30V, smt", Case/Package=1210, Current Rating=20A, Hold Current=500mA, Man. Part Num.=MF-USHT050KX-2, Maximum Voltage=30V, Trip Current=2.5A, HelpURL=https://www.mouser.pl/datasheet/2/54/mf_usht-1128467.pdf, Mounting Technology=SMT, Revision Num.=1.1, Series=MF-USHT
FB1: library part CMP-006-00000-8, "Ferrite Beads 120 OHM 25% Alternate Sizing Guide Below", Case/Package=0805, Current Rating=3A, Man. Part Num.=BLM21PG121SN1D, ESR=30m, HelpURL=https://www.mouser.pl/datasheet/2/281/ENFA0005-1915781.pdf, Impedance="120 Ohm", Mounting Technology=SMT, Revision Num.="Revision #1"
FB2 FB3 FB4 FB5: library part CMP-006-00000-9, "Ferrite Beads 120 OHM 25% Alternate Sizing Guide Below", Case/Package=0805, Current Rating=3A, Man. Part Num.=BLM21PG121SN1D, ESR=30m, HelpURL=https://www.mouser.pl/datasheet/2/281/ENFA0005-1915781.pdf, Impedance="120 Ohm", Mounting Technology=SMT, Revision Num.="Revision #1"
J1: library part CMP-002-00073-5, "Male; Micro-Fit 3.0; 12 Pos. 3mm; 8.5A 600V; Right Angle THT", Man. Part Num.=43045-1200, Mating Part Num.=43025-1200, Max Current Rating=8.5A, Voltage Rating=600V, Gender=Male, HelpURL=https://www.molex.com/en-us/products/part-detail/0430451200?display=pdf, Mating Terminal Num.=43030-0001, Mounting Style=Right-Angle, Mounting Technology=THT, Pin Amount=12, Pitch=3mm, Revision Num.=1, Series="Micro-Fit 3.0"
L1: library part CMP-031-00003-1, "SMD Ind,5.7x5.2x2.8mm,10uH+/-20%,2.8A,shd", Case/Package=2220, Current Rating=2.8A, Man. Part Num.=SRP5030CC-100M, ESR=0.102, HelpURL=https://www.mouser.pl/datasheet/2/54/Bourns_07202023_SRP5030CC-3247830.pdf, Mounting Technology=SMT
L2: library part CMP-006-00019-2, "Inductor; 1uH, 3.1A, 60mΩ, 20%, SMT", Case/Package=0805, Current Rating=3.1A, Man. Part Num.=TMS201610ALM-1R0MTAA, Tolerance=20%, ESR=60m, HelpURL=https://product.tdk.com/system/files/dam/doc/product/inductor/inductor/smd/catalog/inductor_commercial_power_tms201610alm_en.pdf, Mounting Technology=SMT, Revision Num.=0
MH1 MH2: library part CMP-00028-00002-1, "Mounting hole; M3 Screw; 3.4mm x 4.3mm", Man. Part Num.=M3, Diameter=4.3mm, Hole size=3.4mm, Revision Num.=1
OL1: library part CMP-007-00000-15, "LED, 0603 Green 2V 30mA  72mW", Case/Package=0603, Colour=Green, Forward Current=30mA, Forward Voltage=2V, Man. Part Num.=150060VS75000, Power=72mW, HelpURL=https://www.mouser.pl/datasheet/2/445/150060VS75000-3085276.pdf, Mounting Technology=SMT, Revision Num.=1
OL2: library part CMP-007-00001-11, "LED 0603, Blue, 3.2V, 30mA, 105mW", Case/Package=0603, Colour=Blue, Forward Current=30mA, Forward Voltage=3.2V, Man. Part Num.=150060BS75000, Power=105mW, HelpURL=https://www.we-online.com/components/products/datasheet/150060BS75000.pdf, Mounting Technology=SMT, Revision Num.=1
OPAMP1: library part CMP-014-00019-1, "Precision Amplifiers DUAL, PRECISION CMOS RAIL-RAIL OP AMP, GBP - 10MHz, SR - 5V/us, Vos - 20mV, Ib - 250pA", Case/Package=SOIC-8, Man. Part Num.=AD8606ARZ, Max Supply Voltage=5V, Min Supply Voltage=2.7V, Power=1.25W, Channels=2, HelpURL=https://www.mouser.pl/datasheet/2/609/AD8605_8606_8608-1716254.pdf, Mounting Technology=SMT
P1: library part CMP-002-00003-12, "Male; Micro-Lock Plus; 6 Pos. 1.25mm; 1.5A 50V; Straight; SMT;", Man. Part Num.=505568-0671, Mating Part Num.=45111-0600, Max Current Rating=1.5A, Voltage Rating=50V, Gender=Male, HelpURL=https://www.molex.com/en-us/products/part-detail/5055680671?display=pdf, Mounting Style=Straight, Mounting Technology=SMT, Pin Amount=6, Pitch=1.25mm, Revision Num.=1, Series="Micro-Lock Plus"
QN1 QN2 QN3: library part CMP-002-000010-11, "Trans MOSFET N-CH 30V 5A 3-Pin SOT-23 T/R", Case/Package=SOT23-3, Man. Part Num.=IRLML6344TRPBF, Power=1.3W, HelpURL=https://www.mouser.pl/datasheet/2/196/Infineon_IRLML6344_DataSheet_v01_01_EN-3166606.pdf, Id / Ic=5A, Mounting Technology=SMT, Rds / Rce=29m, Revision Num.="Revision #1", Transistor Type=NMOS, Vds / Vce=30V, Vgs / Vbe=12V
QP1: library part CMP-013-00002-22, "MOSFET 30V P-Chnl UMOS", Case/Package=SOT23, Man. Part Num.=ZXMP3A13FTA, Power=625mW, HelpURL=https://www.diodes.com/assets/Datasheets/ZXMP3A13F.pdf, Id / Ic=-1.4A, Mounting Technology=SMT, Rds / Rce=0.33, Revision Num.="Revision #1", Transistor Type=PMOSFET, Vds / Vce=-30V, Vgs / Vbe=-1V
R1 R24 R28 R30 R32: library part CMP-009-00001-19, Case/Package=0603, Power=100mW, Resistance=1k, Tolerance=5%, Voltage Rating=75V, HelpURL=https://eu.mouser.com/datasheet/2/447/YAGEO_PYu_RC_Group_51_RoHS_L_12-3313492.pdf, Mounting Technology=SMT, Revision Num.=1
R2 R5 R8 R14: library part CMP-009-00002-20, Case/Package=0603, Power=100mW, Resistance=10k, Tolerance=5%, Voltage Rating=50V, HelpURL=https://www.tme.eu/Document/d2a72e545e5c8eb7bf2a04fa97535928/rc0603yageo.pdf, Mounting Technology=SMT, Revision Num.=1
R3: library part CMP-009-00121-1, Case/Package=0603, Power=100mW, Resistance=75k, Tolerance=1%, Voltage Rating=75V, HelpURL=https://eu.mouser.com/datasheet/2/315/AOA0000C304-1149620.pdf, Mounting Technology=SMT
R4: library part CMP-009-00162-1, Case/Package=0603, Power=100mW, Resistance=1k, Tolerance=1%, Voltage Rating=75V, HelpURL=https://www.tme.eu/Document/622e28308c06d160637f2b14751ba16b/Data%20Sheet%20CRCW_BCe3.pdf, Mounting Technology=SMT, Revision Num.=1
R6: library part CMP-009-00033-15, Case/Package=0603, Power=100mW, Resistance=220, Tolerance=5%, Voltage Rating=50V, HelpURL=https://www.mouser.pl/datasheet/2/315/AOA0000C334-1314047.pdf, Mounting Technology=SMT, Revision Num.=1
R7 R13: library part CMP-009-00043-18, Case/Package=0603, Power=100mW, Resistance=6.8k, Tolerance=5%, Voltage Rating=50V, HelpURL=https://www.mouser.pl/datasheet/2/54/cr-1858361.pdf, Mounting Technology=SMT, Revision Num.=1
R9 R10 R15 R16: library part CMP-009-00016-19, Case/Package=0603, Power=100mW, Resistance=0, Tolerance=5%, Voltage Rating=50V, HelpURL=https://www.tme.eu/Document/c283990e907c122bb808207d1578ac7f/POWER_RATING-DTE.pdf, Mounting Technology=SMT, Revision Num.=1
R11 R12 R17 R18: library part CMP-009-00157-1, Case/Package=0603, Power=100mW, Resistance=39k, Tolerance=5%, Voltage Rating=75V, HelpURL=https://www.mouser.pl/datasheet/2/315/AOA0000C301-1488782.pdf, Mounting Technology=SMT, Revision Num.=1
R20 R21 R34 R35: library part CMP-009-00038-16, Case/Package=0603, Power=100mW, Resistance=27, Tolerance=5%, Voltage Rating=50V, HelpURL=https://www.mouser.pl/datasheet/2/54/cr-1858361.pdf, Mounting Technology=SMT, Revision Num.=1
R22 R23: library part R_27R_0603_1, Manufacturer=Vishay, Manufacturer Part Number=CRCW060327R0FKEAHP, Power=330mW, Tolerance=1%, Voltage=75V, HelpURL=https://www.vishay.com/docs/20043/crcwhpe3.pdf, Part Number=R_27R_0603_1, SCH_Footprint=0603, Supplier 1=TME, Supplier 2="RS Components", Supplier 3=Farnell, Supplier 4=Mouser, Supplier 5=Digi-Key, Supplier 6=LCSC, Supplier Part Number 3=1738883, Supplier Part Number 4=71-CRCW060327R0FKEAH, Supplier Part Number 5=541-27.0SCT-ND, Supplier Part Number 6=C313718
R25 R26: library part CMP-009-00099-4, Case/Package=0603, Power=100mW, Resistance=1k, Tolerance=1%, Voltage Rating=75V, HelpURL=https://www.tme.eu/Document/622e28308c06d160637f2b14751ba16b/Data%20Sheet%20CRCW_BCe3.pdf, Mounting Technology=SMT, Revision Num.=1
R27: library part CMP-009-00002-16, Case/Package=0603, Power=100mW, Resistance=10k, Tolerance=5%, Voltage Rating=50V, HelpURL=https://www.tme.eu/Document/d2a72e545e5c8eb7bf2a04fa97535928/rc0603yageo.pdf, Mounting Technology=SMT, Revision Num.=1
R29 R31 R33: library part CMP-009-00012-11, Case/Package=0603, Power=100mW, Resistance=100k, Tolerance=5%, Voltage Rating=50V, HelpURL=https://www.tme.eu/Document/fd8030aace7fa4ecbd326eab752e0f92/CQ%20datasheet.pdf, Mounting Technology=SMT, Revision Num.=1
S1: library part CMP-011-00002-8, "Switch; Tact; OFF-(ON); 50mA; 24V", Current Rating=50mA, Man. Part Num.=FSMSMTR, Voltage Rating=24V, Configuration=OFF-(ON), HelpURL=https://www.mouser.pl/ProductDetail/TE-Connectivity-Alcoswitch/FSMSMTR?qs=UhRTNahLC3z8whMdncX%252BKw%3D%3D, Mounting Technology=SMT, Revision Num.=1, Switch Type=Tact
TVS1: library part CMP-00063-1, "Diode; TVS; Bidirectional; 15V, 16.7V, 24.4V SMT", Breakdown Voltage=16.7V, Case/Package=DO-214AA, Clamping Voltage=24.4V, Man. Part Num.=SMBJ15CA-13-F, Working Voltage=15V, HelpURL=https://www.mouser.pl/datasheet/2/115/DIOD_S_A0003133144_1-2542279.pdf, Mounting Technology=SMT, Polarity=Bidirectional
TVS2 TVS3: library part CMP-004-00007-6, "Diode; TVS; 5V 5.6V 9.8V", Breakdown Voltage=5.6V, Case/Package=SOD-523, Clamping Voltage=9.8V, Man. Part Num.=LAD52C05L01, Working Voltage=5V, HelpURL=https://eu.mouser.com/datasheet/2/447/LAD52CXXL01_1-3003079.pdf, Mounting Technology=SMT, Polarity=Bidirectional, Revision Num.=1
TVS4: library part CMP-013-00005-12, "Diode; 2x TVS; 26.5V 28.5V 44V", Breakdown Voltage=28.5V, Case/Package=SOT-323-3, Clamping Voltage=44V, Man. Part Num.=ESDCAN02-2BWY, Working Voltage=26.5V, HelpURL=https://www.mouser.pl/datasheet/2/389/esdcan03_2bwy-1849066.pdf, Mounting Technology=SMT, Polarity=Bidirectional, Revision Num.=1
U3: library part CMP-013-00004-10, "Transceiver; CAN; SN65HVD232; 1Mb/s; 3.3V SMT", Case/Package=SOIC8, Man. Part Num.=SN65HVD232DR, Max Supply Voltage=3.6V, Min Supply Voltage=3V, Communication=CAN, Data Rate=1Mb/s, HelpURL=https://www.ti.com/general/docs/suppproductinfo.tsp?distId=26&gotoUrl=https://www.ti.com/lit/gpn/sn65hvd230, Mounting Technology=SMT, Revision Num.=1, Series=SN65HVD232
UP1: library part CMP-020-00018-2, "MCU High-performance Arm Cortex-M33 MCU 512-Kbyte Flash 272-Kbyte RAM 250 MHz CPU", Case/Package=LQFP48, Clock Frequency=250MHz, Man. Part Num.=STM32H33CET6, Max Supply Voltage=3.6V, Min Supply Voltage=1.7V, HelpURL=https://www.google.com/url?sa=t&source=web&rct=j&opi=89978449&url=https://www.st.com/resource/en/datasheet/stm32h753vi.pdf&ved=2ahUKEwiFsajI8PeHAxUmDRAIHcL-A8EQFnoECBQQAQ&usg=AOvVaw1bta1P1SH6GWAhwR0-a_c9, Mounting Technology=SMT, Pins=37, RAM Size=272kB, Revision Num.=1, ROM Size=512kB, Series=STM32H533xx
VL1: library part CMP-019-00038-1, "LDO; ADP3338AKCZ-5-R7; 1A; 5V; High accuracy over line and load: ±0.8% @ 25°C,", Case/Package=SOT223-3, Man. Part Num.=ADP3338AKCZ-5-R7, Max Output Voltage=5V, Max Supply Voltage=8.5V, Min Supply Voltage=-300mV, Output Current=1A, Power=5W, HelpURL=https://www.mouser.pl/datasheet/2/609/ADP3338-1503401.pdf, Min Output Voltage=5V, Mounting Technology=SMT, Revision Num.=1, Series=ADP3338
VL2: library part CMP-019-00039-1, "LDO; ADP3338AKCZ-5-R7; 1A; 3.3V; High accuracy over line and load: ±0.8% @ 25°C,", Case/Package=SOT223-3, Man. Part Num.=ADP3338AKCZ-3.3-RL, Max Output Voltage=3.3V, Max Supply Voltage=8.5V, Min Supply Voltage=-300mV, Output Current=1A, Power=5W, HelpURL=https://www.mouser.pl/datasheet/2/609/ADP3338-1503401.pdf, Min Output Voltage=3.3V, Mounting Technology=SMT, Revision Num.=1, Series=ADP3338
VS1: library part CMP-019-00023-2, "DC/DC Buck; 3.8-V to 28-V, 3-A Synchronous Buck Converter in SOT583 Package", Case/Package=SOT582, Man. Part Num.=TPS563300DRLR, Max Output Voltage=22V, Max Supply Voltage=28V, Min Output Voltage=800mV, Min Supply Voltage=3.8V, Output Current=3A, HelpURL=https://www.ti.com/lit/ds/symlink/tps563300.pdf?ts=1715787860656&ref_url=https%253A%252F%252Fwww.mouser.co.uk%252F, Mounting Technology=SMT, Revision Num.=0
X1: library part X_16MHz_LFSPXO066657CUTT-6, Frequency=16MHz, Man. Part Num.=LFSPXO066657CUTT, HelpURL=https://www.tme.eu/Document/f2507c161887e0dea281275093e92f79/LFSPXO066657CUTT.pdf, Mounting Technology=SMT

## Via types
v1: diameter 19.68, hole 11.81, Top Layer to Bottom Layer, tented both sides, 243 vias
v2: diameter 20, hole 12, Top Layer to Bottom Layer, tented both sides, 97 vias

## Nets (pads, with @x,y where several pads share a name; then routed paths per layer and width w, separated by ;. In a path a pad name is that pad's centre, name@x,y a point inside that pad or via, vN(x,y) a via of type N, cw(c..) or ccw(c..) an arc to the next point about the centre after c; other vN are vias at no path point)
5V: C10.1 C11.1 J1.4 VL1.2 VL1.4 VL2.3
  other v2: 1820,960 1850,960 1880,960 1910,960
7V: C9.1 FB5.2 VL1.3
12V_IN: DS1.1 DS2.1 DS3.1 F1.1 J1.7 TVS1.2 | length 206.3
  Bottom Layer w20: DS3.1 1167.89,260 1168.29,259.61 1168.68,260 DS1.1 ; J1.7 1434.28,180.2 1470.3,216.22 DS2.1
  other v2: 1166.34,259.61
12V_IN_1: F1.2 QP1.3
12V_IN_2: FB1.1 QP1.2
12V_SAFE: C2.1 C3.1 C4.1 FB1.2 R4.2 VS1.3
A3V3: C30.1 C31.1 C32.1 C33.1 C39.1 L2.2 OPAMP1.8 UP1.9 | length 137.1
  Top Layer w20: OPAMP1.8 612.23,581.27 615,584.04 C39.1 v2(660,655)
  other v2: 440.33,831.71 439.7,859.03
AGND: C14.2 C16.2 C18.2 C19.2 C30.2 C31.2 C32.2 C33.2 C39.2 FB2.2 OPAMP1.4 R8.2 R14.2 TVS2.1 TVS3.1 UP1.8
  other v1: 75,50 225,50 275,50 325,50 375,50 425,50 475,50 525,50 675,50 725,50 775,50 300,100 375,150 675,150 350,200 75,250 50,300 100,300 300,300 350,300 600,300 325,350 375,350 425,350 200,400 450,400 500,400 750,400 475,450 525,450 450,500 500,500 475,550 525,550 50,600 450,600 500,600 75,650 250,700 300,700 350,700 400,700 450,700 275,750
  other v2: 540,110 765,220 660,240 390,300 665,320 285,355 868.19,457.07 105,465 945,470 990,470 910.2,499.69 955.2,499.69 1000.2,499.69 105,530 895,530 940,530 985,530 725,625 755,625 329.22,735 395,735 485,735 550,735 660,735 660,770 440,775 595,775 680,805 680,845 680,880
Air_Press: J1.12 R13.1 TVS3.2 | length 194.2
  Top Layer w10: TVS3.2 R13.1 815,208.9 843.72,180.17 J1.12 ; J1.12@843.72,184.63 J1.12@843.72,194.99
Air_Press_RC_LPF: C17.2 C19.1 OPAMP1.6 OPAMP1.7 R15.2 UP1.15 | length 805.2
  Top Layer w10: OPAMP1.6 OPAMP1.7 668.88,531.27 C17.2 675,590 ; UP1.15 731.1,681.1 675,625 675,590 ; C19.1 1020.19,405 R15.2 937.5,422.5 937.5,433.71 781.21,590 675,590
Air_Press_Sallen-Key_LPF: R16.2 R17.1 | length 71.5
  Top Layer w10: R17.1 818.65,405 R16.2
BOOT: R25.2 R26.1 UP1.44 | length 136.8
  Top Layer w10: UP1.44 770.47,1145.47 R26.1 R25.2
CAN_H: J1.2 R20.2 | length 326.1
  Top Layer w10: J1.2 1360,99.82 1360,300 1378.58,318.58 1378.58,335.51 R20.2
CAN_L: J1.8 R21.2 | length 209.1
  Top Layer w10: R21.2 1250,336.42 1250,295 1316.17,228.83 J1.8
CAN_RX: R23.1 UP1.32 | length 287.9
  Top Layer w10: UP1.32 969.72,950.84 1197.88,950.84 1203.74,944.98 R23.1
CAN_TX: R22.1 UP1.33 | length 497.8
  Top Layer w10: UP1.33 969.72,968.72 1373.76,968.72 1418.74,923.74 R22.1
Clutch: DS3.2 J1.10 QN3.3 | length 159.6
  Bottom Layer w20: J1.10 DS3.2 QN3.3
"Clutch CTRL": R32.1 UP1.25 | length 346.6
  Top Layer w10: UP1.25 v2(1055.2,812.14)
  Bottom Layer w10: R32.1 1042.54,742.54 1055.2,755.2 v2(1055.2,812.14)
EN: C38.1 R4.1 R5.2 VS1.2 | length 263.8
  Top Layer w10: R5.2 R4.1 1847.5,320.87 1847.5,329.73 1872.27,354.5 1882.5,354.5 1897.5,369.5 1897.5,371.5 1905.72,379.72 1926.64,379.72 1949.97,403.05 VS1.2
FB: R2.2 R3.1 VS1.8 | length 185.1
  Top Layer w10: R3.1 R2.2 VS1.8
"Gear Cut": J1.5 UP1.14 | length 867.2
  Top Layer w10: v2(692.28,691.5) 693.8,691.5 711.42,709.12 UP1.14
  Bottom Layer w10: v2(692.28,691.5) 692.28,227.72 795,125 907.64,125 J1.5@961.83,70.8
"Gear Down": DS2.2 J1.3 QN2.3 | length 450.2
  Bottom Layer w20: J1.3 1198.06,66.34 1246.72,115 1340,115 1380,155 1380,240 1400,260 DS2.2 QN2.3
"Gear Down CTRL": R30.1 UP1.29 | length 678.2
  Top Layer w10: UP1.29 v2(1055.2,890.88)
  Bottom Layer w10: v2(1055.2,890.88) 1254.12,890.88 1396.87,748.13 R30.1
"Gear Pos": J1.6 R7.1 TVS2.2 | length 311.9
  Top Layer w10: R7.1 TVS2.2 800.53,114 843.72,70.8 J1.6@843.72,66.52
"Gear POS_SIG": C15.2 C18.1 OPAMP1.1 OPAMP1.2 R9.2 UP1.12 | length 1624.1
  Top Layer w10: C15.2 286.27,531.27 OPAMP1.2 OPAMP1.1 375,655 ; R9.2 C18.1 355,110 80,385 80,570 165,655 375,655 ; UP1.12 631.18,736.18 600.29,705.29 505.29,705.29 455,655 375,655
"Gear Up": DS1.2 J1.9 QN1.3 | length 192.9
  Bottom Layer w20: J1.9 1204.09,174.09 1255,225 1255,257.89 DS1.2 QN1.3 ; DS1.2@1252.1,256.22 DS1.2@1255.88,260
"Gear Up CTRL": R28.1 UP1.27 | length 486
  Top Layer w10: UP1.27 v2(1055.2,851.51)
  Bottom Layer w10: v2(1055.2,851.51) 1118.49,851.51 1219.71,750.29 R28.1
"Gear_Pos_Sallen-Key LPF": R10.2 R11.1 | length 411.7
  Top Layer w10: R11.1 145,400 305.93,239.07 R10.2
GND: C2.2 C3.2 C4.2 C6.2 C7.2 C8.2 C9.2 C10.2 C11.2 C12.2 C13.2 C20.2 C21.2 C22.2 C23.2 C24.2 C25.2 C26.2 C27.2 C28.2 C29.2 C34.2 C35.2 C36.2 C37.2 C38.2 FB2.1 J1.1 J1.11 OL1.1 OL2.1 P1.2 QN1.2 QN2.2 QN3.2 R1.1 R2.1 R5.1 R26.2 R29.2 R31.2 R33.2 S1.1 TVS1.1 TVS4.3 U3.2 UP1.23 UP1.35 UP1.47 VL1.1 VL2.1 VS1.4 X1.2
  other v1: 1525,50 2075,50 2125,50 2175,50 1150,100 1500,100 1550,100 2050,100 2100,100 2150,100 2200,100 2075,150 2125,150 2175,150 2225,150 1750,200 2150,200 2200,200 1775,250 2125,250 2175,250 2225,250 1600,300 2150,300 2200,300 1625,350 1775,350 2125,350 2175,350 2225,350 1550,400 1600,400 1650,400 1700,400 1750,400 2150,400 2200,400 1525,450 1575,450 1625,450 1675,450 1550,500 1600,500 1650,500 1525,550 1575,550 1625,550 1675,550 1550,600 1600,600 1650,600 1700,600 1125,650 1175,650 1275,650 1525,650 1575,650 1625,650 1675,650 1100,700 1150,700 1300,700 1350,700 1450,700 1500,700 1600,700 1650,700 1700,700 975,750 1125,750 1475,750 1525,750 1625,750 2225,750 1100,800 2050,800 2100,800 2150,800 2200,800 825,850 1475,850 1875,850 1925,850 1975,850 2025,850 2075,850 2125,850 2175,850 2225,850 800,900 850,900 1500,900 2100,900 2150,900 2200,900 75,950 125,950 225,950 275,950 325,950 375,950 775,950 825,950 1475,950 2075,950 2125,950 2175,950 2225,950 750,1000 800,1000 850,1000 1500,1000 2100,1000 2150,1000 2200,1000 375,1050 1525,1050 1575,1050 1625,1050 1675,1050 2075,1050 2125,1050 2175,1050 2225,1050 400,1100 950,1100 1650,1100 1700,1100 1900,1100 1950,1100 2000,1100 2050,1100 2100,1100 2150,1100 2200,1100 125,1150 225,1150 275,1150 375,1150 1925,1150 2075,1150 2125,1150 2175,1150 2225,1150 50,1200 100,1200 150,1200 200,1200 250,1200 300,1200 350,1200 400,1200 450,1200 600,1200 950,1200 1000,1200 1050,1200 1100,1200 1450,1200 1500,1200 50,1300 100,1300 150,1300 200,1300 250,1300 450,1300 500,1300 550,1300 600,1300 800,1300 850,1300 900,1300 950,1300 1000,1300 1150,1300 1300,1300 1350,1300 1400,1300 75,1350 125,1350 175,1350 225,1350 275,1350 325,1350 375,1350 425,1350 475,1350 525,1350 575,1350 625,1350 675,1350 1225,1350 1275,1350 1325,1350 1375,1350 1825,1350 1875,1350 1925,1350 2225,1350
  other v2: 2110,215 2110,305 1300,325 1330,325 2100,375 850,580 835,600 865,600 805,625 835,625 865,625 60,730 125,730 20,770 170,775 1830,775 1640,785 1815,795 1842.14,795 1869.29,795 1896.43,795 1923.57,795 1950.71,795 1977.86,795 2005,795 1830,820 1856.67,820 1883.33,820 1910,820 1936.67,820 1963.33,820 1990,820 425,900 415,1150
LED: R24.2 UP1.2 | length 561.7
  Top Layer w10: R24.2 v2(315,1130) ; UP1.2 v2(680,1008.99)
  Bottom Layer w10: v2(315,1130) 315,1040 346.01,1008.99 v2(680,1008.99)
Net*R19_1: *R19.1 C22.1 R21.1 TVS4.2 U3.6 | length 349.5
  Top Layer w10: C22.1 1178.74,481.34 1236.27,481.34 ; U3.6 1287.4,488.33 *R19.1 1279.96,481.34 1236.27,481.34 ; TVS4.2 1289.41,405.67 1273.74,421.34 1237.46,421.34 R21.1 1236.27,481.34
Net*R19_2: *R19.2 C21.1 R20.1 TVS4.1 U3.7 | length 353
  Top Layer w10: U3.7 1337.4,493.45 *R19.2 1393.22,480.89 ; TVS4.1 1340.59,405.79 1356.14,421.34 1392.03,421.34 R20.1 1393.22,480.89 ; C21.1 1453.29,480.89 1393.22,480.89
NetC5_1: C5.1 VS1.6 | length 104.5
  Top Layer w10: C5.1 1928.07,536.93 1928.07,516.05 1933.93,510.2 1961.2,510.2 1968.75,502.66 1968.75,485.04 VS1.6
NetC6_1: C6.1 C7.1 C8.1 FB5.1 L1.2 R3.2 | length 128.9
  Top Layer w10: R3.2 1736.54,653.11 1743.35,659.92 FB5.1
NetC12_1: C12.1 C13.1 FB3.1 VL2.2 VL2.4
NetC14_1: C14.1 OPAMP1.3 R12.2 | length 168.8
  Top Layer w10: R12.2 C14.1 287.64,462.64 315.14,462.64 330.71,478.21 371.94,478.21 OPAMP1.3
NetC15_1: C15.1 R11.2 R12.1 | length 195.4
  Top Layer w10: R11.2 R12.1 215,575 240,600 C15.1
NetC16_1: C16.1 OPAMP1.5 R18.2 | length 182.3
  Top Layer w10: C16.1 OPAMP1.5 666.27,431.27 675,440 675,468.85 R18.2
NetC17_1: C17.1 R17.2 R18.1 | length 134.6
  Top Layer w10: C17.1 745,473.85 R18.1 R17.2
NetC20_1: C20.1 FB4.2 U3.3 | length 154.2
  Top Layer w20: FB4.2@1279.75,912.83 1279.75,843.58 C20.1 1287.11,836.22 C20.1@1288.74,834.6 ; U3.3@1284.61,777.33 1287.11,774.83 1288.74,773.2 U3.3
  Top Layer w25: C20.1@1287.11,836.22 1287.11,774.83 1287.11,772.16 U3.3
NetOL1_2: OL1.2 R6.1 | length 76.9
  Top Layer w10: R6.1 163.97,1015 OL1.2
NetOL2_2: OL2.2 R24.1 | length 74.8
  Top Layer w20: OL2.2 242.08,1013.96 313.96,1013.96 R24.1
NetQN1_1: QN1.1 R28.2 R29.1 | length 145.6
  Bottom Layer w10: QN1.1 R28.2 R29.1
NetQN2_1: QN2.1 R30.2 R31.1 | length 145.6
  Bottom Layer w10: QN2.1 R30.2 R31.1
NetQN3_1: QN3.1 R32.2 R33.1 | length 145.6
  Bottom Layer w10: QN3.1 R32.2 R33.1
NetQP1_1: QP1.1 R1.2 | length 78.9
  Top Layer w20: QP1.1 R1.2
NetR7_2: R7.2 R8.1 R9.1 R10.1 | length 235.4
  Top Layer w10: R9.1 R10.1 ; R8.1 R10.1 ; R7.2 500.93,240 R10.1
NetR13_2: R13.2 R14.1 R15.1 R16.1 | length 207.1
  Top Layer w10: R13.2 880,340 R16.1 ; R14.1 R16.1 ; R15.1 R16.1
NetR22_2: R22.2 U3.1 | length 106.2
  Top Layer w10: U3.1 1387.93,771.34 1408.74,771.34 1418.74,781.34 R22.2 1418.5,837.8 R22.2@1408.74,828.03
NetR23_2: R23.2 U3.4 | length 100.3
  Top Layer w10: R23.2 1203.74,781.34 1213.21,771.87 U3.4 U3.4@1232.93,776.34
NetR34_2: R34.2 UP1.34 | length 203.4
  Top Layer w10: UP1.34 1059.31,989.31 1092.9,1022.9 R34.2
NetR35_2: R35.2 UP1.37 | length 344.4
  Top Layer w10: UP1.37 908.27,1133.27 925,1150 1135,1150 1158.29,1126.71 R35.2
NRST: C37.1 P1.3 R27.1 S1.2 UP1.7 | length 1501.5
  Top Layer w10: v2(575,900) 577.71,900 587.37,909.66 630.28,909.66 UP1.7 ; S1.2@700,1266.48 S1.2 ; v2(700.91,1215) S1.2 ; C37.1 1365,1091.87 R27.1 1317.1,1092.9 1297.14,1112.86 P1.3 1295.92,1197.53 1295.92,1229.08 1160,1365 755,1365 700.91,1310.91 S1.2
  Bottom Layer w10: v2(575,900) 640.1,900 710,969.9 710,1204.14 700.91,1213.24 v2(700.91,1215)
OSC_IN: UP1.5 X1.3 | length 88.1
  Top Layer w10: X1.3 554.98,949.94 UP1.5
SW: C5.2 L1.1 VS1.5
SWDCLK: P1.5 R35.1 | length 115.7
  Top Layer w10: P1.5 1198.71,1156.29 1225,1130 1225,1096.19 R35.1
SWDIO: P1.4 R34.1 | length 224.3
  Top Layer w10: R34.1 1262.9,1022.9 1275,1035 1275,1135 1247.92,1162.08 P1.4
VCAP: C34.1 C35.1 UP1.22 UP1.46 | length 159.5
  Top Layer w10: C35.1 731.1,1152.72 UP1.46 ; C34.1 868.9,683.9 UP1.22
VDD: C23.1 C24.1 C25.1 C26.1 C27.1 C28.1 C29.1 C36.1 FB3.2 FB4.1 L2.1 P1.1 R6.2 R25.1 R27.2 UP1.1 UP1.24 UP1.36 UP1.48 X1.1 X1.4 | length 420.2
  Top Layer w10: R6.2 v2(90,1130) ; R25.1 v2(905,1220) ; UP1.24 908.27,696.24 C25.1 C26.1 C26.1@925,618.57 ; UP1.36 969.72,1029.58 999.58,1029.58 v2(1010,1040) ; v2@1015,1045 C27.1 ; v2(1315,915) 1348.44,915 FB4.1
  Top Layer w15: v2(922.51,585) C26.1
  Top Layer w20: v2(1010,1040) 1010,1070 C27.1
  other v2: 45,895 78.33,895 111.67,895 145,895 500,1045 525,1045 550,1045 1415,1135 1450,1135 1550,1325 1550,1352.5 1550,1380
pads on no net: MH1.1 MH2.1 P1.6 P1.7 P1.8 U3.5 U3.8 UP1.3 UP1.4 UP1.6 UP1.10 UP1.11 UP1.13 UP1.16 UP1.17 UP1.18 UP1.19 UP1.20 UP1.21 UP1.26 UP1.28 UP1.30 UP1.31 UP1.38 UP1.39 UP1.40 UP1.41 UP1.42 UP1.43 UP1.45 VS1.1 VS1.7

## Polygon pours and split planes (outlines as drawn)
GND on Top Layer "GND_L01_P062" (solid, remove dead copper, pour order 62): 0,100 0,1325 cw(c100,1325) 100,1425 2187.2,1425 cw(c2187.2,1325) 2287.2,1325 2287.2,100 cw(c2187.2,100) 2187.2,0 100,0 cw(c100,100)
AGND on Top Layer "NONET_L-01_P-001" (solid, remove dead copper, pour order 32): 695,900 585,900 556.89,871.89 295,871.89 295,805 180,690 -15,690 -15,0 900,0 900,210 925,235 1055,235 1055,303.21 1101.4,303.21 1101.4,438.6 1055,485 980,560 840,560 750,650 750,800 695,800
VDD on Top Layer "NONET_L-01_P-001" (solid, pour order 34): 1380,1220 1380,1145 1410,1115 1410,1065 1465,1065 1465,1140 1450,1155 1410.97,1155 1410.97,1220
12V_IN on Top Layer "NONET_L-01_P-001" (solid, pour order 49): 1715,140 1400.58,140 1395,145.58 1395,220 1405,230 1472.54,230 1472.54,325 1566.8,325 1566.8,230 1701.86,230 1715,230
5V on Top Layer "NONET_L-01_P-001" (solid, pour order 60): 1530,990 1815,990 1815,1115 1800,1130 1705,1130 1705,1190 1815.5,1190 1865,1135 1865,1110 1865,990 1900,990 1940,1030 2040,1030 2040,890 1940,890 1900,930 1530,930
NetC12_1 on Top Layer "NONET_L-01_P-001" (solid, pour order 61): 1540,1280 1640,1280 1640,1380 1670,1380 1665,1375 1665,1280 1900,1280 1940,1320 2035,1320 2035,1180 1940,1180 1900,1220 1540,1220
7V on Top Layer "NONET_L-01_P-001" (solid, pour order 58): 1730,715 1730,825 1710,845 1710,895 1800,895 1800,845 1780,825 1780,715
NetC6_1 on Top Layer "NONET_L-01_P-001" (solid, pour order 57): 2195,645 1740.33,645 1730,645 1730,671.81 1730,675 1790,675 1815,700 2045,700 2080,735 2195,735
SW on Top Layer "NONET_L-01_P-001" (solid, pour order 56): 1982.6,470.27 1982.6,517.4 1972.1,527.9 1962.4,527.9 1960,530.31 1960,575 2015,575 2035,555 2200,555 2200,465 1982.6,465
12V_SAFE on Top Layer "NONET_L-01_P-001" (solid, pour order 55): 2010,110 2010,398.02 1976.47,398.02 1976.47,440 1962.99,440 1962.73,398.02 1955,398.02 1955,330 1874.07,328.92 1874.07,277.95 1953.88,277.95 1955,130 1975,110
VDD on Top Layer "NONET_L-01_P-001" (solid, pour order 17): 1601.44,1390 1530,1390 1530,1310 1600.96,1310
12V_IN_2 on Top Layer "NONET_L-01_P-001" (solid, pour order 51): 1891.89,156.89 1905,170 1935,170 1935,115 1905,115 1892.77,127.23 1820.23,127.23 1820.23,156.98
A3V3 on Top Layer "NONET_L-01_P-001" (solid, pour order 21): 662.11,877.45 562.45,877.45 556.89,871.89 300,871.89 291.89,880 255,880 255,810 255.18,810.18 293.4,810.18 293.4,818.4 295,820 295.41,819.59 575.29,819.59 575.29,865 662.18,865
VDD on Top Layer "NONET_L-01_P-001" (solid, pour order 33): 25,915 25,810 207.5,810 209.5,808 209.5,882 164.5,882 165,882.5 165,915
VDD on Top Layer "NONET_L-01_P-001" (solid, pour order 48): 400,985 565,985 565,1022.79 662.2,1022.79 662.2,1035 565,1035 565,1080 697.62,1080 697.62,1095 565,1095 565,1180 500,1180 500,1060 495,1060 465,1030 400,1030
12V_IN_1 on Top Layer "NONET_L-01_P-001" (solid, pour order 50): 1595,93.02 1735,93.02 1735,125 1805,125 1805,40 1595,40
GND on Bottom Layer "GND_L04_P063" (solid, pour order 63): 0,100 0,1325 cw(c100,1325) 100,1425 2187.2,1425 cw(c2187.2,1325) 2287.2,1325 2287.2,100 cw(c2187.2,100) 2187.2,0 100,0 cw(c100,100)
AGND on Bottom Layer "AGND_L04_P027" (solid, pour order 27): 698.78,900 585,900 565,880 295,880 295,805 180,690 -15,690 -15,0 900,0 900,220 1004.59,220 1004.59,559.37 840,560 750,650 750,800 698.78,800
AGND on 3V3 (split plane): 752.45,918.94 752.45,640 752.64,639.02 753.2,638.2 833.2,558.2 843.2,548.2 844.02,547.64 845,547.45 1012.45,547.45 1012.45,305 1012.45,247.55 940,247.55 939.02,247.35 938.2,246.8 898.2,206.8 897.64,205.98 897.45,205 897.45,51.06 866.49,20.1 100,20.1 99.37,20.03 92.16,20.39 84.39,21.54 76.78,23.45 69.39,26.09 62.29,29.45 55.56,33.49 49.25,38.16 43.43,43.43 38.16,49.25 33.49,55.56 29.45,62.29 26.09,69.39 23.45,76.78 21.54,84.39 20.39,92.16 20.03,99.37 20.1,100 20.1,697.45 180,697.45 180.98,697.64 181.8,698.2 301.8,818.2 406.06,922.45 748.94,922.45
VDD on 3V3 (split plane): 1572.45,1345 1572.45,1206.06 1516.95,1150.55 1463.94,1097.55 1340,1097.55 1339.02,1097.36 1338.2,1096.8 1337.64,1095.98 1337.45,1095 1337.45,970 1337.45,893.06 1283.06,893.06 1283.06,925 1282.83,926.17 1282.55,926.59 1282.55,985 1282.55,1095 1282.36,1095.98 1281.8,1096.8 1280.98,1097.36 1280,1097.55 1020,1097.55 1019.02,1097.36 1018.2,1096.8 1017.64,1095.98 1017.45,1095 1017.45,605 1017.45,567.55 887.55,567.55 887.55,1010 887.36,1010.98 886.8,1011.8 716.8,1181.8 715.98,1182.36 715,1182.55 585,1182.55 584.02,1182.36 583.2,1181.8 582.64,1180.98 582.45,1180 582.45,1022.55 477.55,1022.55 477.55,1175 477.36,1175.98 476.8,1176.8 475.98,1177.36 475,1177.55 175,1177.55 174.02,1177.36 173.2,1176.8 172.65,1175.98 172.45,1175 172.45,812.55 27.55,812.55 27.55,1135 27.55,1262.45 1515,1262.45 1515.98,1262.64 1516.8,1263.2 1529.3,1275.7 1529.86,1276.52 1530.05,1277.5 1530.05,1342.5 1530.05,1402.45 1572.45,1402.45
GND on 3V3 (split plane): 201 vertices, not listed, extent 20.03,20.03 2267.17,1404.97